# Altium PCB LM317-LM337.PcbDoc
Units mil, origin at the board's own origin, x right, y up, seen from the top; angles counter-clockwise.
Board outline 3575 x 2554 mil, 2 copper layers (Top Layer, Bottom Layer); 51 components, 22 nets, 134 pads, 1712 vias.
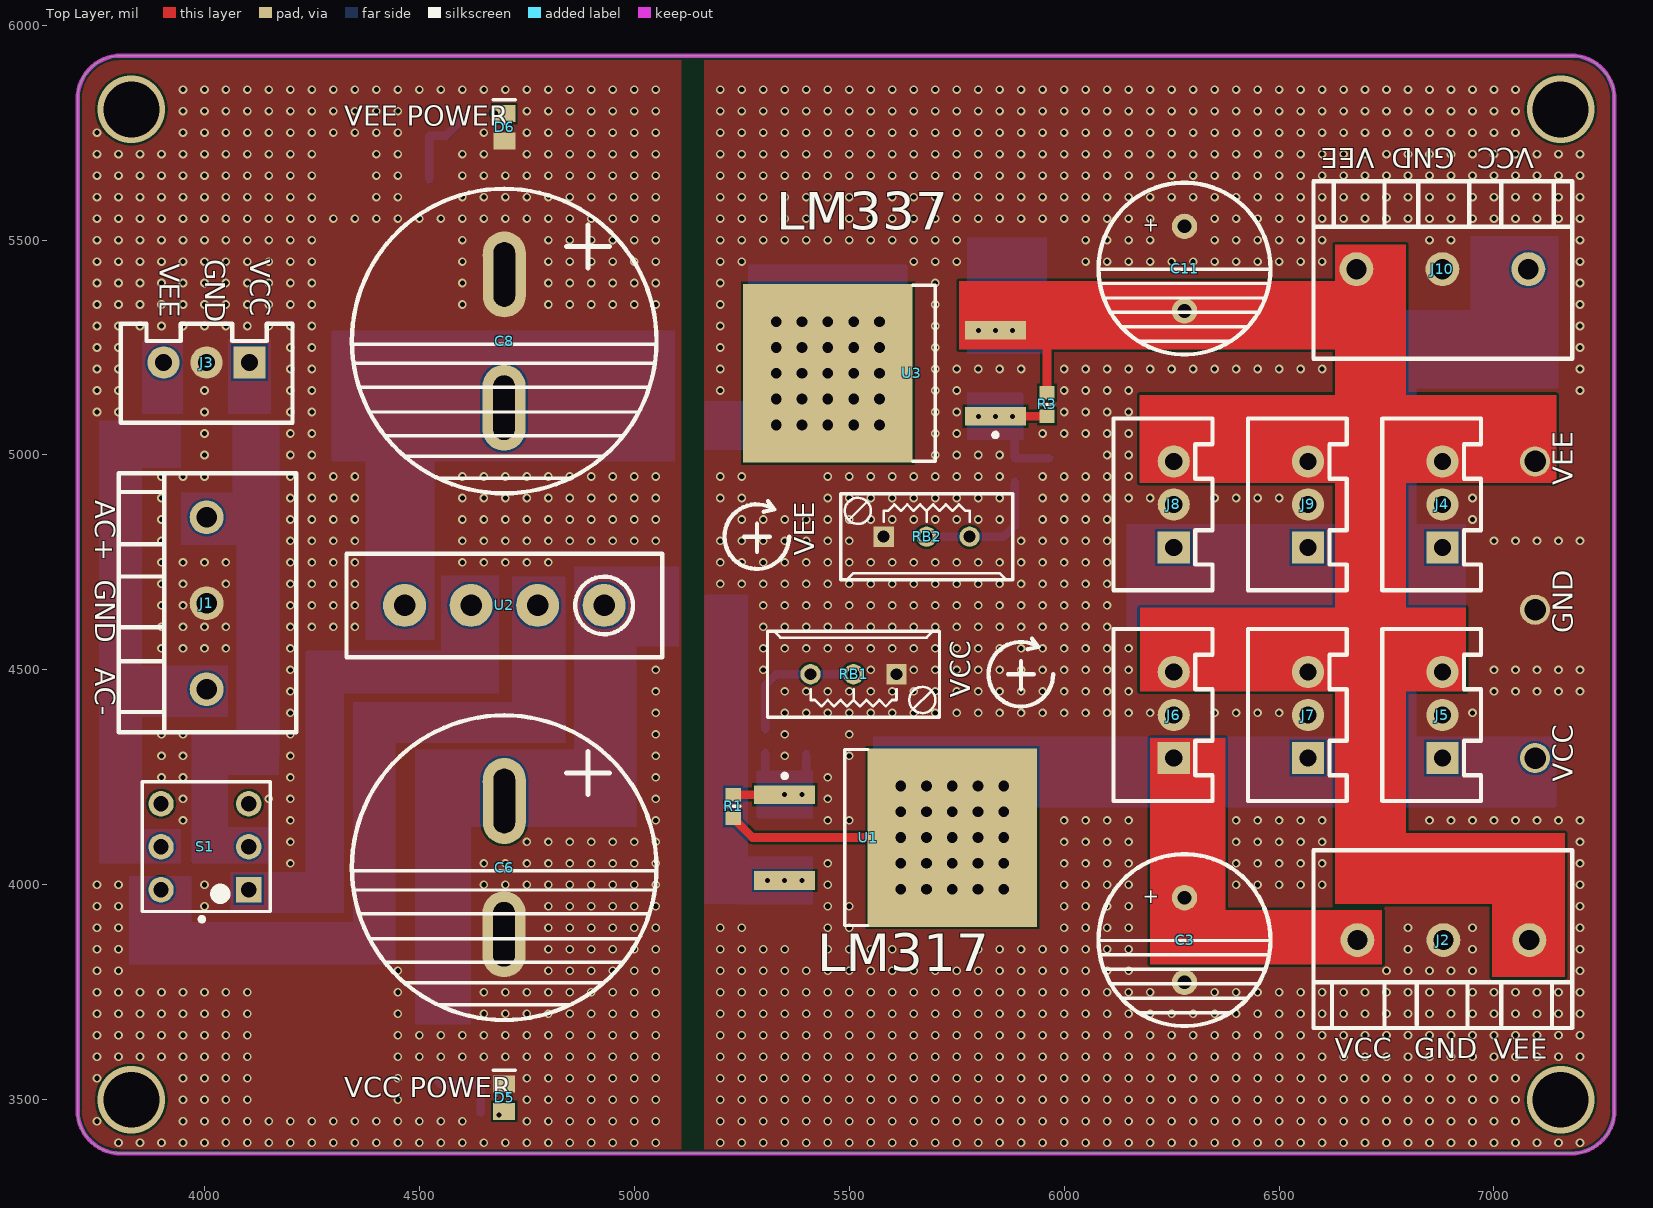
[diagram p0: Top Layer view]
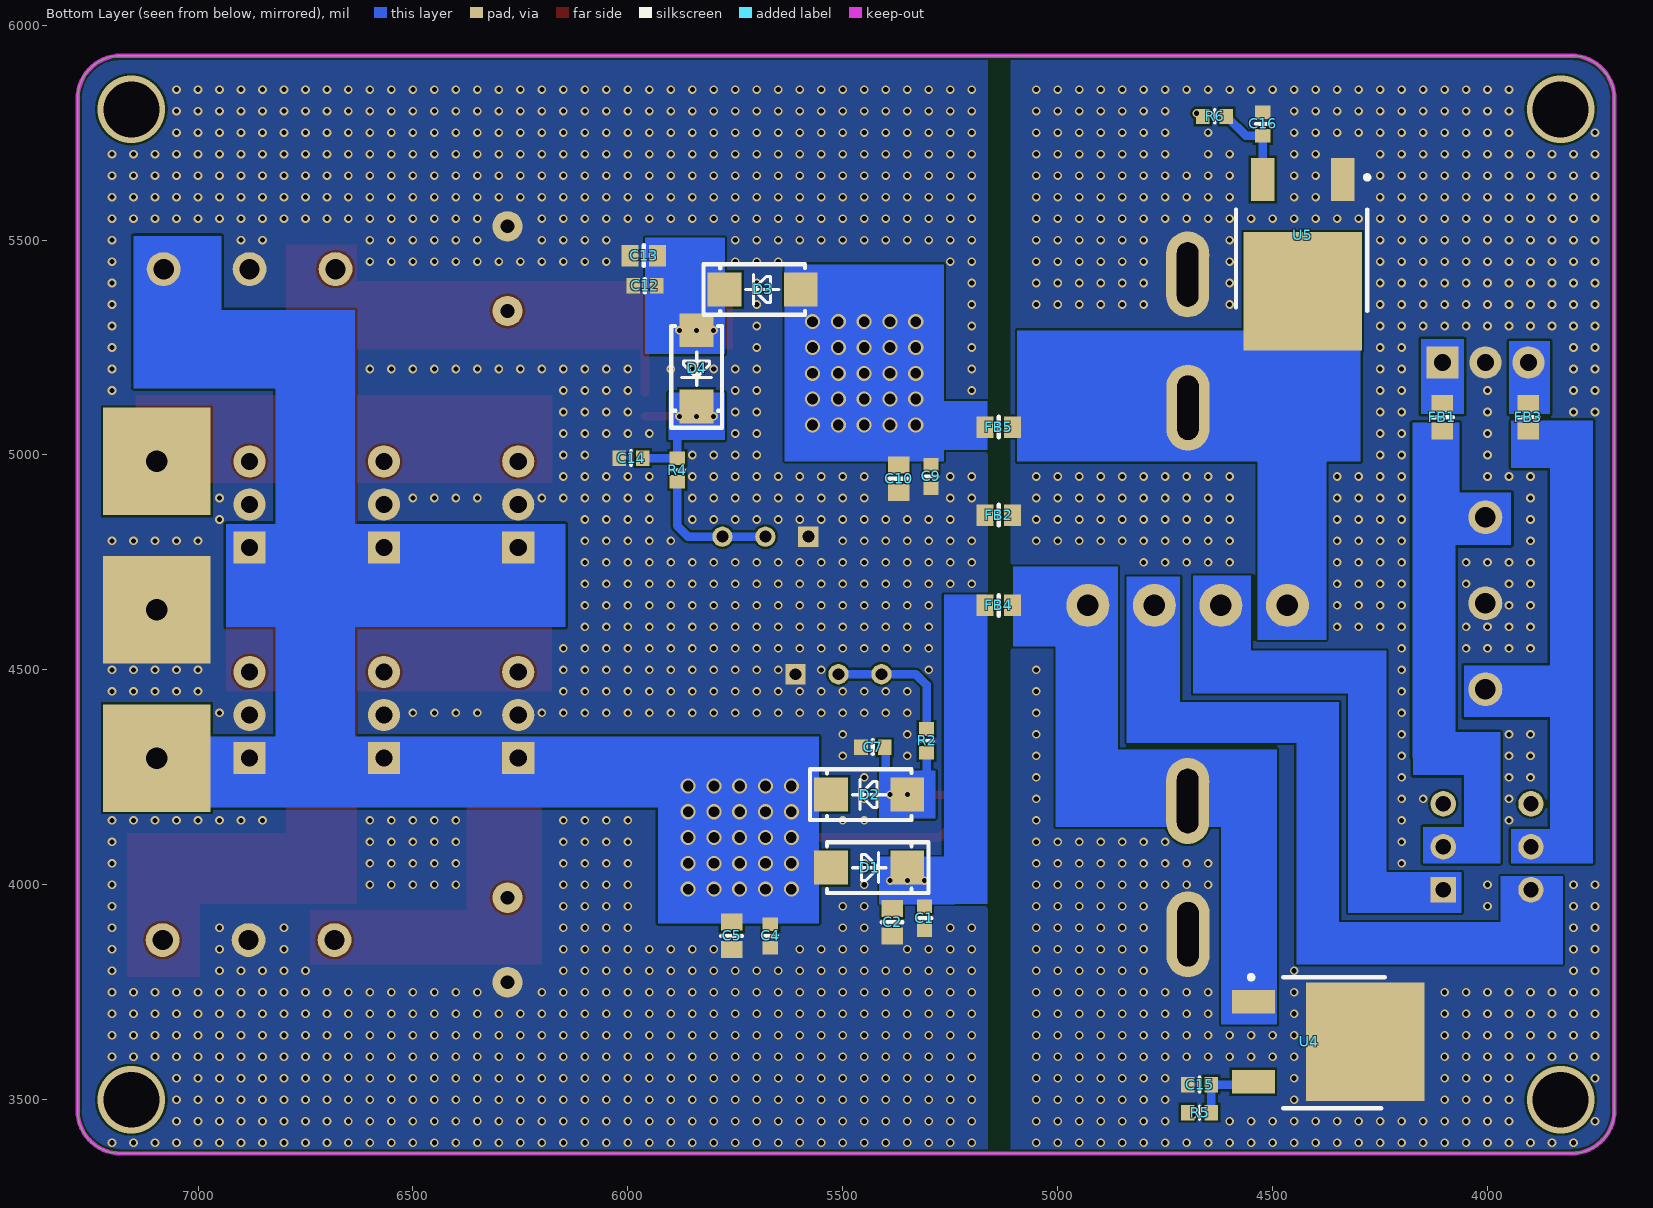
[diagram p1: Bottom Layer view, seen from below]
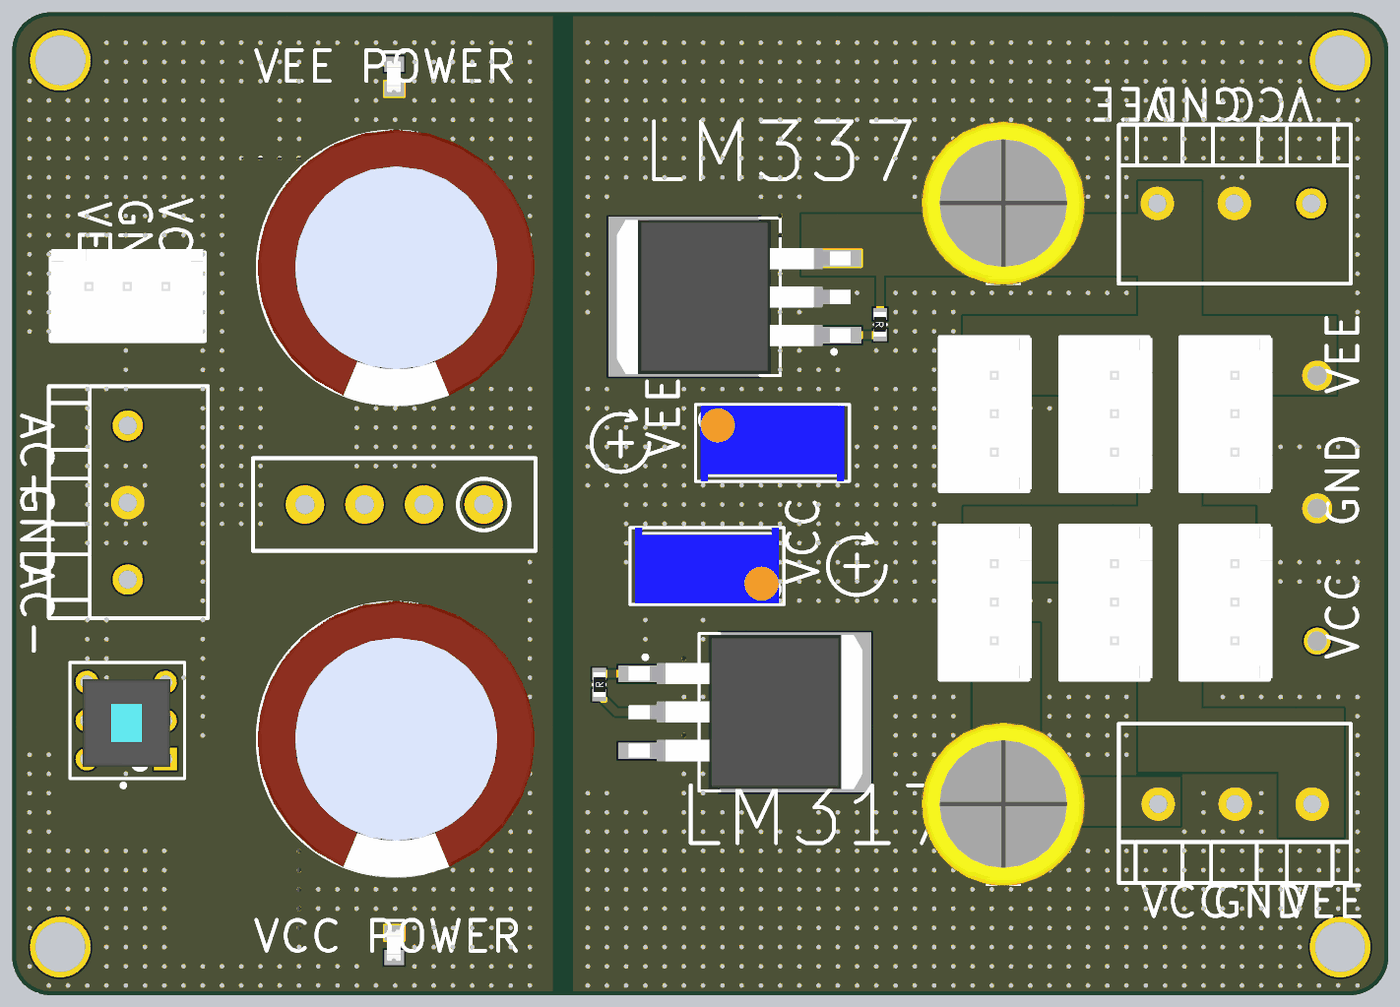
[diagram p2: 3D render of the assembled board from above, using the file's embedded part models]
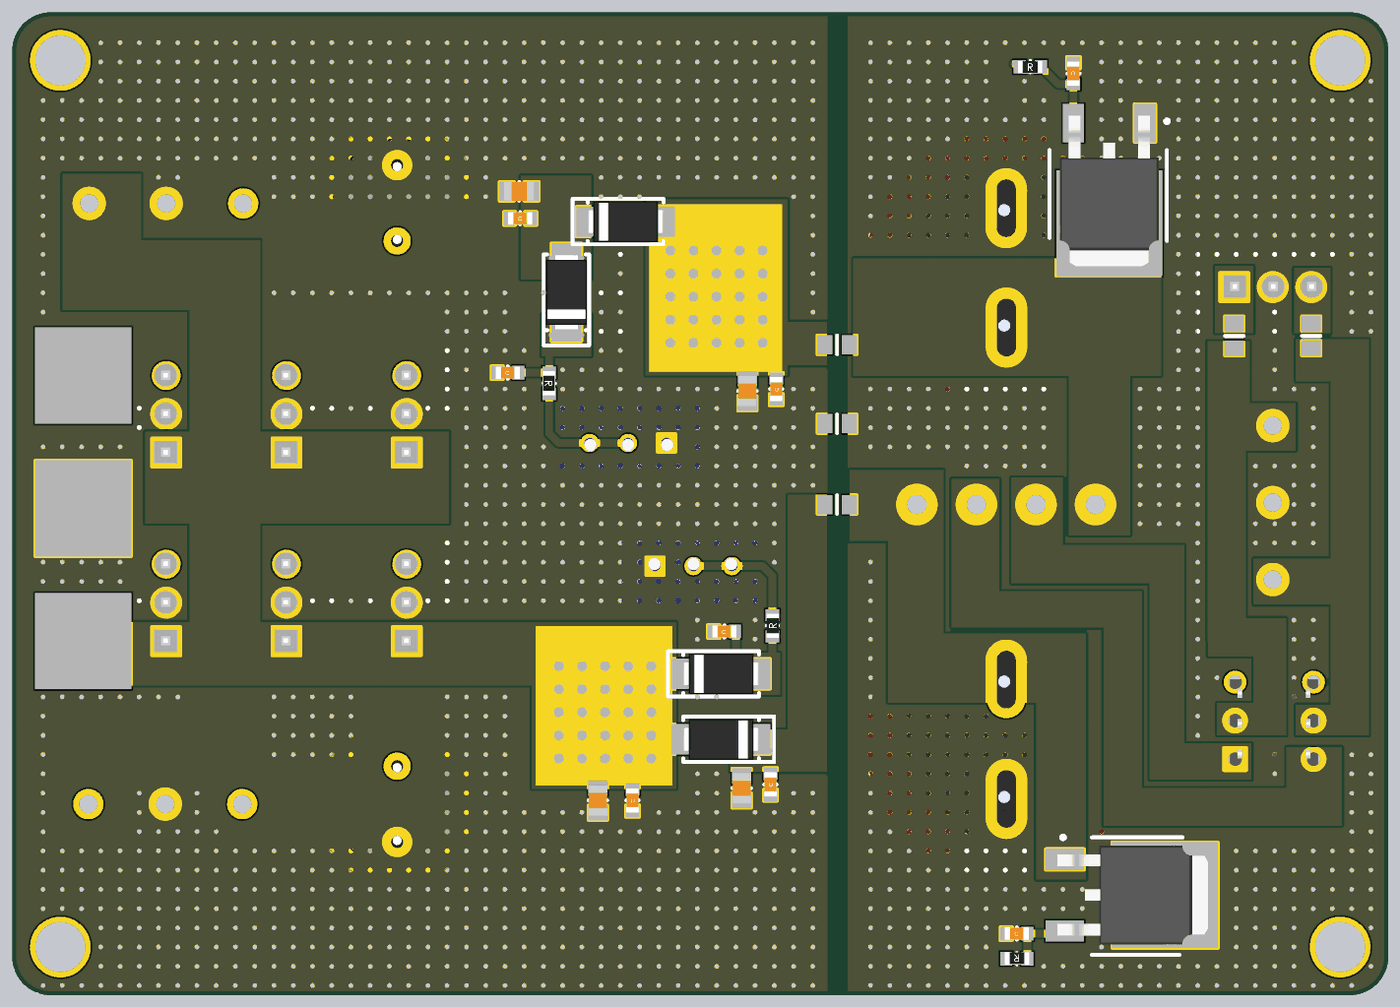
[diagram p3: 3D render of the assembled board from below, using the file's embedded part models]

## Layer stack, top to bottom
Top Solder: solder mask 0.4, Solder Resist, Dk 3.5
Top Layer: signal copper 1.4
Dielectric 1: dielectric 12.6, FR-4, Dk 4.8
Bottom Layer: signal copper 1.4
Bottom Solder: solder mask 0.4, Solder Resist, Dk 3.5

## Board outline
3705,3475 ccw(c3805,3475) 3805,3375 7180,3375 ccw(c7180,3475) 7280,3475 7280,5829 ccw(c7180,5829) 7180,5929 3805,5929 ccw(c3805,5829) 3705,5829

## Design rules (kind name [scope] priority, off if disabled: settings)
Clearance [All] p1: gap=5 ignorepadtopadclearanceinfootprint=TRUE
ComponentClearance [All] p1: gap=0 collisioncheckmode=3 verticalgap=0 showdistances=FALSE
Height [All] p1: minheight=0 maxheight=20000 prefheight=500
HoleSize [All] p1: absolutevalues=TRUE maxlimit=129.92 minlimit=3.94 maxpercent=80.000 minpercent=20.000
MinimumSolderMaskSliver [All] p1: minsoldermaskwidth=0
PolygonConnect [All] p1: connectstyle=Direct reliefconductorwidth=10 reliefentries=4 polygonreliefangle="90 Angle" airgapwidth=10
RoutingVias [All] p1: holewidth=11.81 width=19.68 viastyle="Through Hole" minholewidth=11.81 minwidth=19.68 maxholewidth=129.92 maxwidth=157.48
SilkToSilkClearance [All] p1: silktosilkclearance=0
SilkToSolderMaskClearance [IsPad] p1: minsilkscreentomaskgap=0 clearancetoexposedcopper=TRUE
SolderMaskExpansion [All] p1: expansion=4
Width [All] p1: maxlimit=100 minlimit=5 preferedwidth=5 minimp=50.000000 maximp=50.000000 favimp=50.000000
24 further rules are at their usual default settings.

## Components (designator, comment, footprint, x,y, rotation, side; value= is the part's Value field where it differs from the comment)
C1 "Cap-S" C0603-L 5310,3922.44 r90 bottom value=100nF
C2 "Cap-S" C0805-L 5385,3913 r90 bottom value=47uF
C3 "C" C-DIP-10 6280,3871.57 r270 top value=100uF
C4 "Cap-S" C0603-L 5668.5,3881.13 r90 bottom value=100nF
C5 "Cap-S" C0805-L 5758.5,3881.13 r90 bottom value=47uF
C6 "C" C-DIP-20 4697.25,4240 r270 top value=4700uF
C7 "Cap-S" C0603-L 5430,4320 r180 bottom value=100nF
C8 "C" C-DIP-20 4697.25,5465 r270 top value=4700uF
C9 "Cap-S" C0603-L 5295,4950 r90 bottom value=100nF
C10 "Cap-S" C0805-L 5370,4945 r90 bottom value=47uF
C11 "C" C-DIP-10 6280,5433.43 r270 top value=100uF
C12 "Cap-S" C0603-L 5960.36,5393.62 r180 bottom value=100nF
C13 "Cap-S" C0805-L 5962.8,5463.62 r180 bottom value=47uF
C14 "Cap-S" C0603-L 5992.56,4992.56 r180 bottom value=100nF
C15 "Cap-S" C0603-L 4670,3535 r180 bottom value=100nF
C16 "Cap-S" C0603-L 4523,5770 r270 bottom value=100nF
D1 "D" D-SMA 5438.43,4040 r180 bottom
D2 "D" D-SMA 5438.43,4210 r0 bottom
D3 "D" D-SMA 5686.42,5385 r0 bottom
D4 "D" D-SMA 5840.16,5201.42 r270 bottom
D5 "LED" Led-0805_L 4697.25,3505 r90 top
D6 "LED" Led-0805_L 4697.56,5762 r90 top
FB1 "600R" FB-0805 4105,5088 r270 bottom
FB2 "600R" FB-0805 5137,4860 r0 bottom
FB3 "600R" FB-0805 3905,5088 r270 bottom
FB4 "600R" FB-0805 5137,4650 r0 bottom
FB5 "600R" FB-0805 5137,5065 r0 bottom
J1 "接线座-3P" KF128-5.08-3P 4005,4455 r270 top
J2 "接线座-3P" KF128-5.08-3P 7082.36,3871.57 r0 top
J3 "Power-3P" SIPA03 4105,5215 r180 top
J4 "Power-3P" SIPA03 6880,4785 r90 top
J5 "Power-3P" SIPA03 6880,4295 r90 top
J6 "Power-3P" SIPA03 6255,4295 r90 top
J7 "Power-3P" SIPA03 6567.5,4295 r90 top
J8 "Power-3P" SIPA03 6255,4785 r90 top
J9 "Power-3P" SIPA03 6567.5,4785 r90 top
J10 "接线座-3P" KF128-5.08-3P 6680,5432.43 r180 top
R1 "R" R0603-L 5230,4182.44 r90 top value=10K
R2 "R" R0603-L 5305,4335 r90 bottom value=10K
R3 "R" R0603-L 5960,5117.56 r270 top value=10K
R4 "R" R0603-L 5885,4965 r270 bottom value=10K
R5 "R" R0603-L 4670,3470 r0 bottom value=10K
R6 "R" R0603-L 4635,5787.72 r180 bottom value=10K
RB1 "R" R_VR-3296W 5510,4490 r180 top value=10K
RB2 "R" R_VR-3296W 5680,4810 r0 top value=10K
S1 "SW DPDT" SW_DPDT 4040,4090 r90 top
U1 "LM317M" TO-263-2 5590,4110 r0 top
U2 "KBP30X" Bridge 4929.75,4650 r180 top
U3 "LM337M" TO-263-2 5600,5190 r180 top
U4 "78M05" TO-252 4415,3635 r270 bottom
U5 "79M05" TO-252 4430,5511 r0 bottom

## Footprints (in the part's own frame and the unit in brackets; to place one, negate y for a bottom-side part, rotate by r counter-clockwise, add the part's x,y. Pads: shape width x height; smd on the part's side, far side on the other; paste and mask are expansions set on the pad)
Bridge [mil]
  round 100 hole 50: 1(0,0) 2(154.75,0) 3(309.5,0) 4(464.25,0)
  silkscreen extent -135,-121 599,121, body extent -126,-112 591,112, height 600
C0603-L [mm] "贴片电容0603 高密度"
  rect 0.8x0.9 smd: 1(-0.7,0) 2(0.7,0)
  silkscreen extent 0,-0.39 0,0.41, body extent -0.8,-0.4 0.8,0.41, height 0.88
C0805-L [mil] "贴片电容0805-高密度"
  rect 39.37x50 smd: 1(-32,0) 2(32,0)
  silkscreen extent 0,-24 0,24, body extent -39,-25 39,25, height 24
C-DIP-10 [mm] "5*10*17mm  470uF/35V 1000uF/25V"
  round 1.5 / inner round 1.5 / far side round 1.8 hole 0.8: 1(-2.5,0) 2(2.5,0)
  silkscreen extent -5.08,-5.08 5.08,5.11, body extent -5.4,-5.4 5.41,5.4, height 13
C-DIP-20 [mil] "10*20*31.5mm  4700uF/50V"
  round 100 hole 40: 1(0,0) 2(400,0)
  silkscreen extent -154,-354 554,354, body extent -160,-354 560,365, height 1628
D-SMA [mm]
  rect 2x2 smd: 1(-2.25,0) 2(2.25,0)
  silkscreen extent -2.5,-1.5 3.5,1.5, body extent -2.5,-1.35 2.5,1.35, height 2.15
FB-0805 [mil]
  rect 39.37x50 smd: 1(-32,0) 2(32,0)
  silkscreen extent 0,-24 0,24, body extent -40,-25 40,25, height 28
KF128-5.08-3P [mm]
  round 2 hole 1.2: 1(-10.16,0) 2(-5.08,0) 3(0,0)
  silkscreen extent -12.76,-5.2 2.54,5.3, body extent -12.66,-5.1 2.34,5.2, height 14.1
Led-0805_L [mm] "贴片LED0805-高密度"
  rect 1x1.3 smd: 1(-0.813,0) 2(0.813,0)
  silkscreen extent 1.63,-0.66 1.63,0.66, body extent -1.03,-0.44 1.03,0.47, height 0.85
R0603-L [mm] "贴片电阻0603 高密度"
  rect 0.8x0.9 smd: 1(-0.7,0) 2(0.7,0)
  silkscreen extent 0,-0.39 0,0.41, body extent -0.81,-0.43 0.79,0.39, height 0.53
R_VR-3296W [mm] "Potentiometer; 3 Leads"
  rect 1.2x1.2 hole 0.7: 1(-2.54,0)
  round 1.2 hole 0.7: 2(0,0) 3(2.54,0)
  silkscreen extent -5.08,-2.54 5.08,2.54, body extent -4.75,-2.54 4.75,2.46, height 11.5
SIPA03 [mil]
  rect 75x75 hole 40: 1(0,0)
  round 75 hole 40: 2(100,0) 3(200,0)
  silkscreen extent -100,-90 300,140, body extent -96,-99 298,137, height 276
SW_DPDT [mm] "自锁开关"
  rect 1.5x1.5 hole 0.9: 1(-2.578,-1.6)
  round 1.5 hole 0.9: 2(-0.038,-1.6) 3(2.502,-1.6) 4(2.502,3.581) 5(-0.038,3.581) 6(-2.578,3.581)
  silkscreen extent -4.44,-2.87 3.8,4.7, body extent -3.1,-1.93 2.7,3.87, height 10
TO-252 [mil]
  rect 55.12x100 smd: 1(-93,-130) 3(93,-130)
  rect 275.59x275.59 smd: 2(0,130)
  silkscreen extent -155,-140 155,176, body extent -129,-150 129,241, height 94
TO-263-2 [mm] "D2-PAK, 4-Leads, Body 8.6x10.2mm, Pitch 2.54mm, Lead Span 14.2mm, IPC Low Density"
  rect 3.6x1.1 smd: 1(-6.1,2.54) 3(-6.1,-2.54)
  rect 10x10.55 smd: 2(3.804,0)
  silkscreen extent -6.22,-5.2 -1.2,5.2, body extent -7.2,-5.07 8.24,5.09, height 4.69

## Part data
C1 C2 C4 C5 C7 C9 C10 C12 C13 C14 C15 C16: "贴片瓷片电容"
C3 C6 C8 C11: library part Cap-Pol-ER, "极性直插电解电容"
D1 D2 D3 D4: library part Diode, "二极管"
D5 D6: "发光二极管"
FB1 FB2 FB3 FB4 FB5: library part FB
J3 J4 J5 J6 J7 J8 J9: "供电端子"
R1 R2 R3 R4 R5 R6: library part Res, "贴片电阻"
RB1 RB2: library part Res_Val, "可调电阻"
S1: "自锁开关", Code_IPC=SOT26A-6, Code_JEITA=SC-74, LatestRevisionDate=29-May-2009, LatestRevisionNote="IPC-7351 Footprint Added.", PackageDescription="6-Pin SOT-23 Package 0.95 mm Pitch, 2.7 mm Lead Span", PackageReference=SOT23-6, PackageVersion=Mar-2001, Published=24-Mar-1999, Publisher="Altium Limited"
U2: library part Bridge

## Free pads (board coordinates)
  round 70 hole 50: 7(7095.5,4295) 7(7095.5,4640) 7(7095.5,4985)
  oval 100x200 hole 50 slot 150 at 90 deg: 8(4696.94,3885) 8(4696.94,5110) 8(4697.56,4195) 8(4697.56,5420)
  rect 250x250 smd far side: 9(7095.5,4295) 9(7095.5,4640) 9(7095.5,4985)

## Via types
v1: diameter 20, hole 12, Top Layer to Bottom Layer, tented both sides, 1645 vias
v2: diameter 35, hole 25, Top Layer to Bottom Layer, tented both sides, 50 vias
v3: diameter 19.68, hole 11.81, Top Layer to Bottom Layer, tented both sides, 13 vias
v4: diameter 157.48, hole 129.92, Top Layer to Bottom Layer, 4 vias

## Nets (pads, with @x,y where several pads share a name; then routed paths per layer and width w, separated by ;. In a path a pad name is that pad's centre, name@x,y a point inside that pad or via, vN(x,y) a via of type N, cw(c..) or ccw(c..) an arc to the next point about the centre after c; other vN are vias at no path point)
GND: C1.1 C2.1 C3.2 C4.1 C5.1 C7.1 C9.1 C10.1 C11.1 C12.1 C13.1 C14.1 FB2.2 J2.2 J4.2 J5.2 J6.2 J7.2 J8.2 J9.2 J10.2 pad.7@7095.5,4640 pad.9@7095.5,4640 RB1.1 RB2.1
  other v1: 5200,3400 5250,3400 5300,3400 5350,3400 5400,3400 5450,3400 5500,3400 5550,3400 5600,3400 5650,3400 5700,3400 5750,3400 5800,3400 5850,3400 5900,3400 5950,3400 6000,3400 6050,3400 6100,3400 6150,3400 6200,3400 6250,3400 6300,3400 6350,3400 6400,3400 6450,3400 6500,3400 6550,3400 6600,3400 6650,3400 6700,3400 6750,3400 6800,3400 6850,3400 6900,3400 6950,3400 7000,3400 7050,3400 7100,3400 7150,3400 7200,3400 5200,3450 5250,3450 5300,3450 5350,3450 5400,3450 5450,3450 5500,3450 5550,3450 5600,3450 5650,3450 5700,3450 5750,3450 5800,3450 5850,3450 5900,3450 5950,3450 6000,3450 6050,3450 6100,3450 6150,3450 6200,3450 6250,3450 6300,3450 6350,3450 6400,3450 6450,3450 6500,3450 6550,3450 6600,3450 6650,3450 6700,3450 6750,3450 6800,3450 6850,3450 6900,3450 6950,3450 7000,3450 7050,3450 5200,3500 5250,3500 5300,3500 5350,3500 5400,3500 5450,3500 5500,3500 5550,3500 5600,3500 5650,3500 5700,3500 5750,3500 5800,3500 5850,3500 5900,3500 5950,3500 6000,3500 6050,3500 6100,3500 6150,3500 6200,3500 6250,3500 6300,3500 6350,3500 6400,3500 6450,3500 6500,3500 6550,3500 6600,3500 6650,3500 6700,3500 6750,3500 6800,3500 6850,3500 6900,3500 6950,3500 7000,3500 7050,3500 5200,3550 5250,3550 5300,3550 5350,3550 5400,3550 5450,3550 5500,3550 5550,3550 5600,3550 5650,3550 5700,3550 5750,3550 5800,3550 5850,3550 5900,3550 5950,3550 6000,3550 6050,3550 6100,3550 6150,3550 6200,3550 6250,3550 6300,3550 6350,3550 6400,3550 6450,3550 6500,3550 6550,3550 6600,3550 6650,3550 6700,3550 6750,3550 6800,3550 6850,3550 6900,3550 6950,3550 7000,3550 7050,3550 5200,3600 5250,3600 5300,3600 5350,3600 5400,3600 5450,3600 5500,3600 5550,3600 5600,3600 5650,3600 5700,3600 5750,3600 5800,3600 5850,3600 5900,3600 5950,3600 6000,3600 6050,3600 6100,3600 6150,3600 6200,3600 6250,3600 6300,3600 6350,3600 6400,3600 6450,3600 6500,3600 6550,3600 6600,3600 6650,3600 6700,3600 6750,3600 6800,3600 6850,3600 6900,3600 6950,3600 7000,3600 7050,3600 7100,3600 7150,3600 7200,3600 5200,3650 5250,3650 5300,3650 5350,3650 5400,3650 5450,3650 5500,3650 5550,3650 5600,3650 5650,3650 5700,3650 5750,3650 5800,3650 5850,3650 5900,3650 5950,3650 6000,3650 6050,3650 6100,3650 6150,3650 6200,3650 6250,3650 6300,3650 6350,3650 6400,3650 6450,3650 6500,3650 6550,3650 6600,3650 6650,3650 6700,3650 6750,3650 6800,3650 6850,3650 6900,3650 6950,3650 7000,3650 7050,3650 7100,3650 7150,3650 7200,3650 5200,3700 5250,3700 5300,3700 5350,3700 5400,3700 5450,3700 5500,3700 5550,3700 5600,3700 5650,3700 5700,3700 5750,3700 5800,3700 5850,3700 5900,3700 5950,3700 6000,3700 6050,3700 6100,3700 6150,3700 6200,3700 6250,3700 6300,3700 6350,3700 6400,3700 6450,3700 6500,3700 6550,3700 6600,3700 6650,3700 6700,3700 6750,3700 6800,3700 6850,3700 6900,3700 6950,3700 7000,3700 7050,3700 7100,3700 7150,3700 7200,3700 5200,3750 5250,3750 5300,3750 5350,3750 5400,3750 5450,3750 5500,3750 5550,3750 5600,3750 5650,3750 5700,3750 5750,3750 5800,3750 5850,3750 5900,3750 5950,3750 6000,3750 6050,3750 6100,3750 6150,3750 6200,3750 6350,3750 6400,3750 6450,3750 6500,3750 6550,3750 6600,3750 6650,3750 6700,3750 6750,3750 6800,3750 6850,3750 6900,3750 6950,3750 7000,3750 7050,3750 7100,3750 7150,3750 7200,3750 5200,3800 5250,3800 5300,3800 5350,3800 5400,3800 5450,3800 5500,3800 5550,3800 5600,3800 5650,3800 5700,3800 5750,3800 5800,3800 5850,3800 5900,3800 5950,3800 6000,3800 6050,3800 6100,3800 6150,3800 6750,3800 6800,3800 6850,3800 6900,3800 6950,3800 7200,3800 5200,3850 5250,3850 5300,3850 5350,3850 5450,3850 5500,3850 5550,3850 5600,3850 5800,3850 5850,3850 5900,3850 5950,3850 6000,3850 6050,3850 6100,3850 6150,3850 6800,3850 6950,3850 7200,3850 5200,3900 5250,3900 5450,3900 5500,3900 6000,3900 6050,3900 6100,3900 6150,3900 6800,3900 6950,3900 7200,3900 5450,3950 5500,3950 6000,3950 6050,3950 6100,3950 6150,3950 7200,3950 5450,4000 6000,4000 6050,4000 6100,4000 6150,4000 6400,4000 6450,4000 6500,4000 6550,4000 6600,4000 7200,4000 5450,4050 6000,4050 6050,4050 6100,4050 6150,4050 6400,4050 6450,4050 6500,4050 6550,4050 6600,4050 7200,4050 6000,4100 6050,4100 6100,4100 6150,4100 6400,4100 6450,4100 6500,4100 6550,4100 6600,4100 7200,4100 5450,4150 5500,4150 6000,4150 6050,4150 6100,4150 6150,4150 6400,4150 6450,4150 6500,4150 6550,4150 6600,4150 6850,4150 6900,4150 6950,4150 7000,4150 7050,4150 7100,4150 7150,4150 7200,4150 5450,4200 5450,4250 5350,4300 5500,4300 5350,4350 5500,4350 5350,4400 5400,4400 5450,4400 5500,4400 5550,4400 5600,4400 5650,4400 5700,4400 5750,4400 5800,4400 5850,4400 5900,4400 5950,4400 6000,4400 6050,4400 6100,4400 6150,4400 6200,4400 6350,4400 6400,4400 6450,4400 6500,4400 6950,4400 5350,4450 5400,4450 5450,4450 5500,4450 5550,4450 5600,4450 5650,4450 5700,4450 5750,4450 5800,4450 5850,4450 5900,4450 5950,4450 6000,4450 6050,4450 6100,4450 6150,4450 7000,4450 7050,4450 7100,4450 7150,4450 7200,4450 5300,4500 5550,4500 5650,4500 5700,4500 5750,4500 5800,4500 5850,4500 5900,4500 5950,4500 6000,4500 6050,4500 6100,4500 6150,4500 7000,4500 7050,4500 7100,4500 7150,4500 7200,4500 5300,4550 5350,4550 5400,4550 5450,4550 5500,4550 5550,4550 5600,4550 5650,4550 5700,4550 5750,4550 5800,4550 5850,4550 5900,4550 5950,4550 6000,4550 6050,4550 6100,4550 6150,4550 5300,4600 5350,4600 5400,4600 5450,4600 5500,4600 5550,4600 5600,4600 5650,4600 5700,4600 5750,4600 5800,4600 5850,4600 5900,4600 5950,4600 6000,4600 6050,4600 6100,4600 5300,4650 5350,4650 5400,4650 5450,4650 5500,4650 5550,4650 5600,4650 5650,4650 5700,4650 5750,4650 5800,4650 5850,4650 5900,4650 5950,4650 6000,4650 6050,4650 6100,4650 5200,4700 5250,4700 5300,4700 5350,4700 5400,4700 5450,4700 5500,4700 5550,4700 5600,4700 5650,4700 5700,4700 5750,4700 5800,4700 5850,4700 5900,4700 5950,4700 6000,4700 6050,4700 6100,4700 5200,4750 5250,4750 5300,4750 5350,4750 5400,4750 5450,4750 5500,4750 5550,4750 5600,4750 5650,4750 5700,4750 5750,4750 5800,4750 5850,4750 5900,4750 5950,4750 6000,4750 6050,4750 6100,4750 5200,4800 5250,4800 5300,4800 5350,4800 5400,4800 5450,4800 5500,4800 5900,4800 5950,4800 6000,4800 6050,4800 6100,4800 7000,4800 7050,4800 7100,4800 7150,4800 7200,4800 5250,4850 5300,4850 5350,4850 5400,4850 5450,4850 5500,4850 5550,4850 5600,4850 5650,4850 5700,4850 5750,4850 5800,4850 5850,4850 5950,4850 6000,4850 6050,4850 6100,4850 6950,4850 5200,4900 5250,4900 5450,4900 5500,4900 5550,4900 5600,4900 5650,4900 5700,4900 5750,4900 5800,4900 5850,4900 5950,4900 6000,4900 6050,4900 6100,4900 6150,4900 6200,4900 6350,4900 6400,4900 6450,4900 6500,4900 6950,4900 5200,4950 5250,4950 5450,4950 5500,4950 5550,4950 5600,4950 5650,4950 5700,4950 5750,4950 5800,4950 5850,4950 5950,4950 6000,4950 6050,4950 6100,4950 6150,4950 5700,5000 5750,5000 5800,5000 5850,5000 6100,5000 6150,5000 5700,5050 5750,5050 5950,5050 6000,5050 6050,5050 6100,5050 6150,5050 5700,5100 5750,5100 6000,5100 6050,5100 6100,5100 6150,5100 5200,5150 5700,5150 5750,5150 6000,5150 6050,5150 6100,5150 6150,5150 7200,5150 5200,5200 5700,5200 5750,5200 5800,5200 5850,5200 5900,5200 6000,5200 6050,5200 6100,5200 6150,5200 6200,5200 6250,5200 6300,5200 6350,5200 6400,5200 6450,5200 6500,5200 6550,5200 6600,5200 7200,5200 5200,5250 5700,5250 7200,5250 5200,5300 5700,5300 7200,5300 5200,5350 5700,5350 7200,5350 5200,5400 5700,5400 7200,5400 5200,5450 5250,5450 5650,5450 5700,5450 5750,5450 6050,5450 6100,5450 6150,5450 6200,5450 6250,5450 6300,5450 6350,5450 6400,5450 6450,5450 6500,5450 6550,5450 6600,5450 7200,5450 5200,5500 5250,5500 5300,5500 5350,5500 5400,5500 5450,5500 5500,5500 5550,5500 5600,5500 5650,5500 5700,5500 5750,5500 6050,5500 6100,5500 6150,5500 6200,5500 6350,5500 6400,5500 6450,5500 6500,5500 6550,5500 6600,5500 6850,5500 6900,5500 7200,5500 5200,5550 5250,5550 5300,5550 5350,5550 5400,5550 5450,5550 5500,5550 5550,5550 5600,5550 5650,5550 5700,5550 5750,5550 5800,5550 5850,5550 5900,5550 5950,5550 6000,5550 6050,5550 6100,5550 6150,5550 6200,5550 6350,5550 6400,5550 6450,5550 6500,5550 6550,5550 6600,5550 6650,5550 6700,5550 6750,5550 6800,5550 6850,5550 6900,5550 6950,5550 7000,5550 7050,5550 7100,5550 7150,5550 7200,5550 5200,5600 5250,5600 5300,5600 5350,5600 5400,5600 5450,5600 5500,5600 5550,5600 5600,5600 5650,5600 5700,5600 5750,5600 5800,5600 5850,5600 5900,5600 5950,5600 6000,5600 6050,5600 6100,5600 6150,5600 6200,5600 6250,5600 6300,5600 6350,5600 6400,5600 6450,5600 6500,5600 6550,5600 6600,5600 6650,5600 6700,5600 6750,5600 6800,5600 6850,5600 6900,5600 6950,5600 7000,5600 7050,5600 7100,5600 7150,5600 7200,5600 5200,5650 5250,5650 5300,5650 5350,5650 5400,5650 5450,5650 5500,5650 5550,5650 5600,5650 5650,5650 5700,5650 5750,5650 5800,5650 5850,5650 5900,5650 5950,5650 6000,5650 6050,5650 6100,5650 6150,5650 6200,5650 6250,5650 6300,5650 6350,5650 6400,5650 6450,5650 6500,5650 6550,5650 6600,5650 6650,5650 6700,5650 6750,5650 6800,5650 6850,5650 6900,5650 6950,5650 7000,5650 7050,5650 7100,5650 7150,5650 7200,5650 5200,5700 5250,5700 5300,5700 5350,5700 5400,5700 5450,5700 5500,5700 5550,5700 5600,5700 5650,5700 5700,5700 5750,5700 5800,5700 5850,5700 5900,5700 5950,5700 6000,5700 6050,5700 6100,5700 6150,5700 6200,5700 6250,5700 6300,5700 6350,5700 6400,5700 6450,5700 6500,5700 6550,5700 6600,5700 6650,5700 6700,5700 6750,5700 6800,5700 6850,5700 6900,5700 6950,5700 7000,5700 7050,5700 7100,5700 7150,5700 7200,5700 5200,5750 5250,5750 5300,5750 5350,5750 5400,5750 5450,5750 5500,5750 5550,5750 5600,5750 5650,5750 5700,5750 5750,5750 5800,5750 5850,5750 5900,5750 5950,5750 6000,5750 6050,5750 6100,5750 6150,5750 6200,5750 6250,5750 6300,5750 6350,5750 6400,5750 6450,5750 6500,5750 6550,5750 6600,5750 6650,5750 6700,5750 6750,5750 6800,5750 6850,5750 6900,5750 6950,5750 7000,5750 7050,5750 5200,5800 5250,5800 5300,5800 5350,5800 5400,5800 5450,5800 5500,5800 5550,5800 5600,5800 5650,5800 5700,5800 5750,5800 5800,5800 5850,5800 5900,5800 5950,5800 6000,5800 6050,5800 6100,5800 6150,5800 6200,5800 6250,5800 6300,5800 6350,5800 6400,5800 6450,5800 6500,5800 6550,5800 6600,5800 6650,5800 6700,5800 6750,5800 6800,5800 6850,5800 6900,5800 6950,5800 7000,5800 7050,5800 5200,5850 5250,5850 5300,5850 5350,5850 5400,5850 5450,5850 5500,5850 5550,5850 5600,5850 5650,5850 5700,5850 5750,5850 5800,5850 5850,5850 5900,5850 5950,5850 6000,5850 6050,5850 6100,5850 6150,5850 6200,5850 6250,5850 6300,5850 6350,5850 6400,5850 6450,5850 6500,5850 6550,5850 6600,5850 6650,5850 6700,5850 6750,5850 6800,5850 6850,5850 6900,5850 6950,5850 7000,5850 7050,5850
GNDIN: C6.2 C8.1 C15.1 C16.1 D5.2 D6.1 FB2.1 J1.2 J3.2 pad.8@4696.94,3885 pad.8@4697.56,5420 U4.2 U5.1
  other v1: 3800,3400 3850,3400 3900,3400 3950,3400 4000,3400 4050,3400 4100,3400 4150,3400 4200,3400 4250,3400 4300,3400 4350,3400 4400,3400 4450,3400 4500,3400 4550,3400 4600,3400 4650,3400 4700,3400 4750,3400 4800,3400 4850,3400 4900,3400 4950,3400 5000,3400 5050,3400 3750,3450 3950,3450 4000,3450 4050,3450 4100,3450 4150,3450 4200,3450 4250,3450 4300,3450 4350,3450 4400,3450 4450,3450 4500,3450 4550,3450 4600,3450 4750,3450 4800,3450 4850,3450 4900,3450 4950,3450 5000,3450 5050,3450 3950,3500 4000,3500 4050,3500 4100,3500 4450,3500 4750,3500 4800,3500 4850,3500 4900,3500 4950,3500 5000,3500 5050,3500 3750,3550 3950,3550 4000,3550 4050,3550 4100,3550 4450,3550 4750,3550 4800,3550 4850,3550 4900,3550 4950,3550 5000,3550 5050,3550 3750,3600 3800,3600 3850,3600 3900,3600 3950,3600 4000,3600 4050,3600 4100,3600 4450,3600 4500,3600 4550,3600 4600,3600 4650,3600 4700,3600 4750,3600 4800,3600 4850,3600 4900,3600 4950,3600 5000,3600 5050,3600 3750,3650 3800,3650 3850,3650 3900,3650 3950,3650 4000,3650 4050,3650 4100,3650 4450,3650 4500,3650 4550,3650 4600,3650 4650,3650 4700,3650 4750,3650 4800,3650 4850,3650 4900,3650 4950,3650 5000,3650 5050,3650 3750,3700 3800,3700 3850,3700 3900,3700 3950,3700 4000,3700 4050,3700 4100,3700 4450,3700 4650,3700 4700,3700 4750,3700 4800,3700 4850,3700 4900,3700 4950,3700 5000,3700 5050,3700 3750,3750 3800,3750 3850,3750 3900,3750 3950,3750 4000,3750 4050,3750 4100,3750 4450,3750 4650,3750 4700,3750 4750,3750 4800,3750 4850,3750 4900,3750 4950,3750 5000,3750 5050,3750 3750,3800 3800,3800 4450,3800 4800,3800 4850,3800 4900,3800 4950,3800 5000,3800 5050,3800 3750,3850 3800,3850 4800,3850 4850,3850 4900,3850 4950,3850 5000,3850 5050,3850 3750,3900 3800,3900 4800,3900 4850,3900 4900,3900 4950,3900 5000,3900 5050,3900 3750,3950 3800,3950 4000,3950 4800,3950 4850,3950 4900,3950 4950,3950 5000,3950 5050,3950 3750,4000 3800,4000 4000,4000 4650,4000 4700,4000 4750,4000 4800,4000 4850,4000 4900,4000 4950,4000 5000,4000 5050,4000 4200,4050 4650,4050 4700,4050 4750,4050 4800,4050 4850,4050 4900,4050 4950,4050 5000,4050 5050,4050 4200,4100 4750,4100 4800,4100 4850,4100 4900,4100 4950,4100 5000,4100 5050,4100 3950,4150 4200,4150 5050,4150 3950,4200 4150,4200 4200,4200 5050,4200 3900,4250 3950,4250 4200,4250 5050,4250 3900,4300 3950,4300 4200,4300 5050,4300 3900,4350 3950,4350 4200,4350 5050,4350 4200,4400 5050,4400 4200,4450 5050,4450 4200,4500 5050,4500 3900,4550 3950,4550 4000,4550 4050,4550 4200,4550 3900,4600 3950,4600 4000,4600 4050,4600 4200,4600 4250,4600 4300,4600 4350,4600 3900,4650 3950,4650 4200,4650 4250,4650 4300,4650 4350,4650 3900,4700 3950,4700 4050,4700 4200,4700 4250,4700 4300,4700 4350,4700 3900,4750 3950,4750 4000,4750 4050,4750 4200,4750 4250,4750 4300,4750 4350,4750 4600,4750 4650,4750 4700,4750 4750,4750 4800,4750 3900,4800 4200,4800 4250,4800 4300,4800 4350,4800 4600,4800 4650,4800 4700,4800 4750,4800 4800,4800 4850,4800 4900,4800 4950,4800 5000,4800 5050,4800 3900,4850 4200,4850 4250,4850 4300,4850 4350,4850 4600,4850 4650,4850 4700,4850 4750,4850 4800,4850 4850,4850 4900,4850 4950,4850 5000,4850 5050,4850 3900,4900 4200,4900 4250,4900 4300,4900 4350,4900 4600,4900 4650,4900 4700,4900 4750,4900 4800,4900 4850,4900 4900,4900 4950,4900 5000,4900 5050,4900 3900,4950 3950,4950 4000,4950 4200,4950 4250,4950 4300,4950 4350,4950 4600,4950 4650,4950 4700,4950 4750,4950 4800,4950 4850,4950 4900,4950 4950,4950 5000,4950 5050,4950 4000,5000 4200,5000 4250,5000 4000,5050 4200,5050 4250,5050 3750,5100 3800,5100 4000,5100 4200,5100 4250,5100 3750,5150 3800,5150 4000,5150 4200,5150 4250,5150 3750,5200 3800,5200 4200,5200 4250,5200 3750,5250 3800,5250 4200,5250 4250,5250 3750,5300 3800,5300 3850,5300 3900,5300 3950,5300 4000,5300 4050,5300 4100,5300 4150,5300 4200,5300 4250,5300 3750,5350 3800,5350 3850,5350 3900,5350 3950,5350 4000,5350 4050,5350 4100,5350 4150,5350 4200,5350 4250,5350 4600,5350 4800,5350 4850,5350 4900,5350 4950,5350 5000,5350 5050,5350 3750,5400 3800,5400 3850,5400 3900,5400 3950,5400 4000,5400 4050,5400 4100,5400 4150,5400 4200,5400 4250,5400 4600,5400 4800,5400 4850,5400 4900,5400 4950,5400 5000,5400 5050,5400 3750,5450 3800,5450 3850,5450 3900,5450 3950,5450 4000,5450 4050,5450 4100,5450 4150,5450 4200,5450 4250,5450 4600,5450 4800,5450 4850,5450 4900,5450 4950,5450 5000,5450 5050,5450 3750,5500 3800,5500 3850,5500 3900,5500 3950,5500 4000,5500 4050,5500 4100,5500 4150,5500 4200,5500 4250,5500 4600,5500 4800,5500 4850,5500 4900,5500 4950,5500 5000,5500 5050,5500 3750,5550 3800,5550 3850,5550 3900,5550 3950,5550 4000,5550 4050,5550 4100,5550 4150,5550 4200,5550 4250,5550 4300,5550 4350,5550 4400,5550 4450,5550 4500,5550 4550,5550 4600,5550 4650,5550 4700,5550 4750,5550 4800,5550 4850,5550 4900,5550 4950,5550 5000,5550 5050,5550 3750,5600 3800,5600 3850,5600 3900,5600 3950,5600 4000,5600 4050,5600 4100,5600 4150,5600 4200,5600 4250,5600 4400,5600 4450,5600 4600,5600 4650,5600 4700,5600 4750,5600 4800,5600 4850,5600 4900,5600 4950,5600 5000,5600 5050,5600 3750,5650 3800,5650 3850,5650 3900,5650 3950,5650 4000,5650 4050,5650 4100,5650 4150,5650 4200,5650 4250,5650 4400,5650 4450,5650 4600,5650 4650,5650 4700,5650 4750,5650 4800,5650 4850,5650 4900,5650 4950,5650 5000,5650 5050,5650 3750,5700 3800,5700 3850,5700 3900,5700 3950,5700 4000,5700 4050,5700 4100,5700 4150,5700 4200,5700 4250,5700 4400,5700 4450,5700 4600,5700 4650,5700 4750,5700 4800,5700 4850,5700 4900,5700 4950,5700 5000,5700 5050,5700 3750,5750 3950,5750 4000,5750 4050,5750 4100,5750 4150,5750 4200,5750 4250,5750 4300,5750 4350,5750 4400,5750 4450,5750 4650,5750 4750,5750 4800,5750 4850,5750 4900,5750 4950,5750 5000,5750 5050,5750 3950,5800 4000,5800 4050,5800 4100,5800 4150,5800 4200,5800 4250,5800 4300,5800 4350,5800 4400,5800 4450,5800 4750,5800 4800,5800 4850,5800 4900,5800 4950,5800 5000,5800 5050,5800 3950,5850 4000,5850 4050,5850 4100,5850 4150,5850 4200,5850 4250,5850 4300,5850 4350,5850 4400,5850 4450,5850 4500,5850 4550,5850 4600,5850 4650,5850 4700,5850 4750,5850 4800,5850 4850,5850 4900,5850 4950,5850 5000,5850 5050,5850
NetC6_1: C6.1 FB4.1 pad.8@4697.56,4195 U2.1 U4.1
NetC7_2: C7.2 D2.1 R1.2 R2.1 U1.1 | length 299.7
  Top Layer w20: R1.2 v3(5349.84,4210)
  Bottom Layer w20: 5305,4175 R2.1 ; 5400,4257.56 C7.2@5400,4305
  other v3: 5389.69,4210
NetC8_2: C8.2 FB5.1 pad.8@4696.94,5110 U2.4 U5.2
NetC14_2: C14.2 D4.2 R3.2 R4.1 U3.1 | length 332.3
  Top Layer w20: v3(5840.16,5090) v3(5880,5090) R3.2
  Bottom Layer w20: 5885,5125 R4.1 C14.2
  other v3: 5800.31,5090
NetC15_2: C15.2 R5.1 U4.3 | length 165.3
  Bottom Layer w20: U4.3 4552,3535 C15.2 R5.1
NetC16_2: C16.2 R6.2 U5.3 | length 204.6
  Bottom Layer w20: U5.3 C16.2 4562.16,5742.44 R6.2
NetD5_1: D5.1 R5.2
  other v3: 4685,3465
NetD6_2: D6.2 R6.1
  other v3: 4676.76,5795
NetFB1_1: FB1.1 J3.1 | length 0
NetFB1_2: FB1.2 J1.1 S1.2
NetFB3_1: FB3.1 J3.3
NetFB3_2: FB3.2 J1.3 S1.5
NetR2_2: R2.2 RB1.2 RB1.3 | length 317.8
  Bottom Layer w20: R2.2 5305,4465 5330,4490 RB1.3 RB1.2
NetR4_2: R4.2 RB2.2 RB2.3 | length 317.8
  Bottom Layer w20: RB2.2 RB2.3 5860,4810 5885,4835 R4.2
NetS1_1: S1.1 U2.3
NetS1_6: S1.6 U2.2
VCCIN: C1.2 C2.2 D1.2 FB4.2 U1.3
  other v3: 5310,4010 5349.84,4010 5389.69,4010
VCCOUT: C3.1 C4.2 C5.2 D1.1 D2.2 J2.1 J4.1 J5.1 J6.1 J7.1 J8.1 J9.1 J10.1 pad.7@7095.5,4295 pad.9@7095.5,4295 R1.1 U1.2 | length 528.4
  Top Layer w20: R1.1 5274.88,4110 v2(5739.76,4110)
  other v2: 5619.76,3990 5679.76,3990 5739.76,3990 5799.76,3990 5859.76,3990 5619.76,4050 5679.76,4050 5739.76,4050 5799.76,4050 5859.76,4050 5619.76,4110 5679.76,4110 5799.76,4110 5859.76,4110 5619.76,4170 5679.76,4170 5739.76,4170 5799.76,4170 5859.76,4170 5619.76,4230 5679.76,4230 5739.76,4230 5799.76,4230 5859.76,4230
VEEIN: C9.2 C10.2 D3.1 FB5.2 U3.2
  other v2: 5330.24,5070 5390.24,5070 5450.24,5070 5510.24,5070 5570.24,5070 5330.24,5130 5390.24,5130 5450.24,5130 5510.24,5130 5570.24,5130 5330.24,5190 5390.24,5190 5450.24,5190 5510.24,5190 5570.24,5190 5330.24,5250 5390.24,5250 5450.24,5250 5510.24,5250 5570.24,5250 5330.24,5310 5390.24,5310 5450.24,5310 5510.24,5310 5570.24,5310
VEEOUT: C11.2 C12.2 C13.2 D3.2 D4.1 J2.3 J4.3 J5.3 J6.3 J7.3 J8.3 J9.3 J10.3 pad.7@7095.5,4985 pad.9@7095.5,4985 R3.1 U3.3 | length 144.9
  Top Layer w20: R3.1 5960,5290
  other v3: 5800.31,5290 5840.16,5290 5880,5290
pads on no net: S1.3 S1.4
copper on no net:
  other v4: 3830,3500 7155,3500 3830,5804 7155,5804

## Polygon pours and split planes (outlines as drawn)
GND on Bottom Layer "Bottom Layer-GND" (solid, pour order 28): 5162.31,5929.01 5162.31,3375 7280,3375 7280,5929 6530,5929
GNDIN on Bottom Layer "Bottom Layer-GNDIN" (solid, pour order 24): 3705,5929 3705,3375 5120,3375 5120,5930
GND on Top Layer (solid, pour order 32): 5162.31,5929.01 7280,5929.01 7280,3375 5155,3375
GNDIN on Top Layer "Top Layer-GNDIN" (solid, pour order 26): 3705,5929 3705,3375 5120,3375 5120,5930

## Keep-outs
Keep-Out Layer:
  the board outline again, w10

## Other copper
Top Layer:
  rectangle net VCCOUT: 6200,3815 6740,3941.16
  rectangle net VCCOUT: 6200,3815 6375,4341.81
  rectangle net VEEOUT: 6995,3785 7165,4120
  rectangle net VEEOUT: 6630,3955 7165,4120
  rectangle net VEEOUT: 6630,3955 6795,5490
  rectangle net VEEOUT: 6175.99,4450 6935,4645
  rectangle net VEEOUT: 6175,4935 7145,5140
  rectangle net VEEOUT: 5755,5245 6750,5405
  pour cut-out: 5109.69,3375.01 5162.31,3375.01 5162.31,5929.01 5109.69,5929.01
Bottom Layer:
  rectangle net NetFB3_1: 3855,5095 3950,5265
  rectangle net NetFB1_1: 4055,5095 4155,5270
  rectangle net NetFB1_2: 3970,4050 4150,4135
  rectangle net NetFB1_2: 3970,4050 4055,4355
  rectangle net NetFB1_2: 3970,4255 4173.73,4355
  rectangle net NetFB1_2: 4075,4295 4175,4800
  rectangle net NetFB1_2: 4065,4790 4175,5075
  rectangle net NetFB1_2: 3945,4790 4175,4913
  rectangle net NetFB3_2: 3790,4390 4055,4510
  rectangle net NetFB3_2: 3755,4970 3945,5080
  rectangle net NetFB3_2: 3755,4050 3855,5035
  rectangle net NetFB3_2: 3755,4050 3945,4130
  rectangle net NetS1_6: 4715,4330 4840,4717.2
  rectangle net NetS1_6: 4345,4330 4840,4425
  rectangle net NetS1_6: 4345,3815 4445,4425
  rectangle net NetS1_6: 3825,3815 4445,3913
  rectangle net NetS1_6: 3825,3815 3970,4020
  rectangle net NetS1_1: 4550,4445 4685,4720
  rectangle net NetS1_1: 4235,4445 4680,4545
  rectangle net NetS1_1: 4235,3935 4325,4485
  rectangle net NetS1_1: 4060.12,3935 4310,4030
  rectangle net NetC6_1: 4490,3675 4620.25,4314.72
  rectangle net NetC6_1: 4599.8,4135 5005,4315
  rectangle net NetC6_1: 4860,4135 5005,4570
  rectangle net NetC6_1: 4860,4555 5103.81,4740
  rectangle net NetC8_2: 4375,4570 4535,5025
  rectangle net NetC8_2: 4295,4984.37 5095,5290
  rectangle net VEEIN: 5163,5011.42 5300.63,5125.05
  rectangle net VCCIN: 5163,3955 5265,4675.31
  rectangle net VCCOUT: 6635,5155 7150,5337.5
  rectangle net VCCOUT: 6635,4310.58 6820,5337.5
  rectangle net VCCOUT: 6945,5300 7150,5510
  rectangle net VCCOUT: 6145,4600 6935,4840
  rectangle net VCCOUT: 5555,4180 7145,4345
  rectangle net VCCOUT: 5555,3910.58 5930,4314.72
  rectangle net VEEIN: 5265,4985.28 5635,5443.62
  pour cut-out: 5109.69,3375.01 5162.31,3375.01 5162.31,5929.01 5109.69,5929.01
  region net VEEOUT: 5775.16,5505 5959.23,5505 5959.23,5235 5775.16,5235
  region net NetC14_2: 5775.16,5145 5905.16,5145 5905.16,5035 5775.16,5035
  region net NetC7_2: 5414.84,4155 5284.84,4155 5284.84,4265 5414.84,4265
  region net VCCIN: 5414.84,3955 5240,3955 5240,4065 5414.84,4065

## Silkscreen, mask and mechanical layers (free items; w line width, h text height)
Top Overlay:
  lines w10: 5255,4810 5315,4810 ; 5285.63,4775 5285.63,4840 ; 5300.81,4868.12 5325.81,4873.12 ; 5310.81,4893.12 5325.81,4873.12 ; 5360.17,4810 cw(c5285,4810) 5325.81,4873.12 ; 5869.21,4490 5929.21,4490 ; 5899.85,4455 5899.85,4520 ; 5915.03,4548.12 5940.03,4553.12 ; 5925.03,4573.12 5940.03,4553.12 ; 5974.38,4490 cw(c5899.21,4490) 5940.03,4553.12
  text "VEE POWER" at 4325,5750 h80
  text "VEE" at 6723.15,5730.37 h80 r180
  text "GND" at 6908.15,5730 h80 r180
  text "VCC" at 7093.15,5730.07 h80 r180
  text "LM337" at 5330,5495 h150
  text "GND" at 3985,5455 h80 r270
  text "VCC" at 4090,5455 h80 r270
  text "VEE" at 3879.69,5445 h80 r270
  text "VEE" at 7200,4930 h80 r90
  text "AC+" at 3730,4895 h80 r270
  text "VEE" at 5435,4765 h80 r90
  text "GND" at 3730,4710 h80 r270
  text "GND" at 7200,4585 h80 r90
  text "AC-" at 3730,4505 h80 r270
  text "VCC" at 5797.64,4435 h80 r90
  text "VCC" at 7200,4240 h80 r90
  text "LM317" at 5425.71,3769.77 h150
  text "VCC" at 6630,3579.93 h80
  text "GND" at 6815,3580 h80
  text "VEE" at 7000,3579.63 h80
  text "VCC POWER" at 4325,3490 h80
Bottom Solder:
  rectangle: 5565,3920 5920,4334.54
  rectangle: 5280,4995 5625,5430
Mechanical 1:
  the board outline again, w10

## Text inside footprints (layer, text, board x,y; h text height)
C3: Top Overlay "+" at 6175.99,3992.42 h60 r270
C11: Top Overlay "+" at 6175.99,5554.27 h60 r270